# Allegro board P1_2024_433C_STERGAREL_ELISABETA-ELENA_SERS_N21_OrCAD.brd
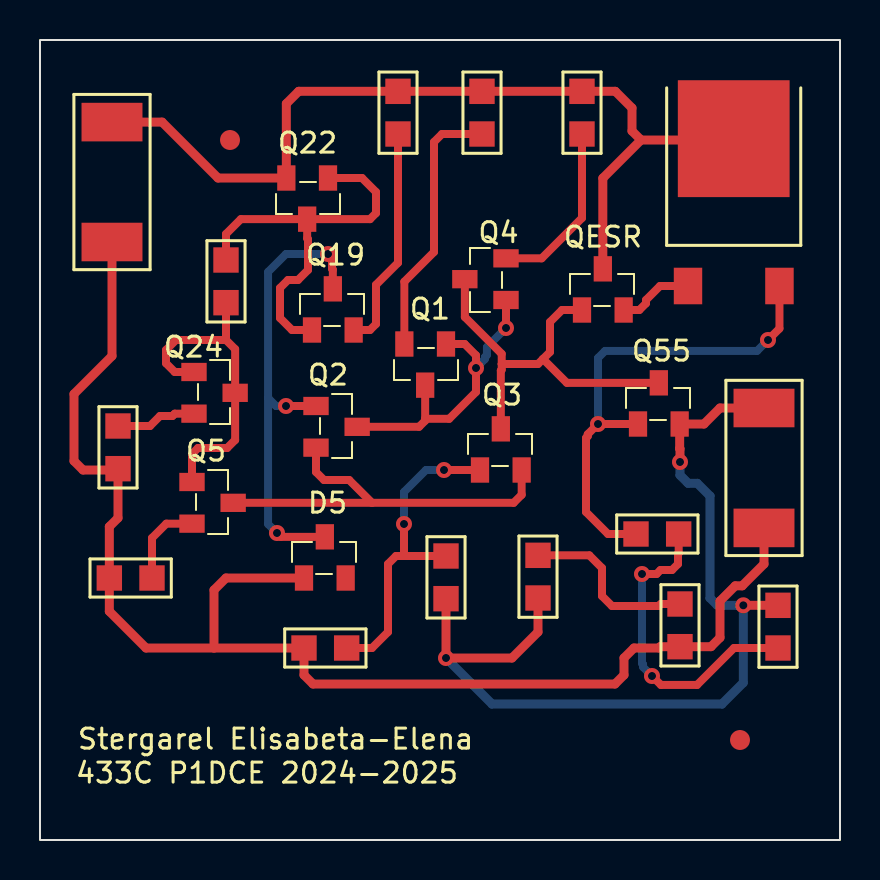
[diagram p0: board, top side]
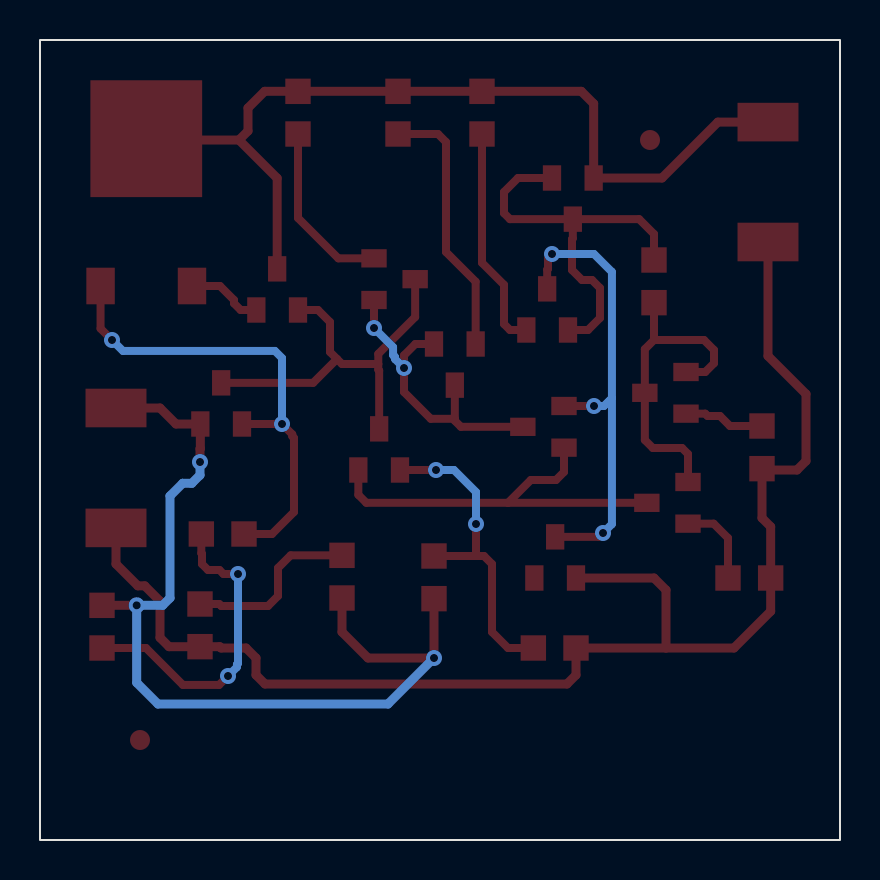
[diagram p1: board, bottom side, seen from below]

Outline 40 x 40 mm; copper layers: TOP, BOTTOM. Coordinates in mm from the lower left corner of the outline.
Outline path: rectangle 0,0 40,40

## Design rules (mm)
nets with their own width: min track width 0.4; nets N208506 N208522 N208646 N208652 N208728 N208762 N208912 N209608 N209614 N209650 N209658 N209706 N210042 N210082 N216038 N2084760
nets with their own width: min track width 0.45; nets 0 OUT VCC

## Placement (name value [footprint] x y rotation side)
D5  BZX84-C5V1  [TO236AA]  13.2 13.1 270 top
J1  CON2  [SMR2512]  3.6 29.9 90 top
J2  CON2  [SMR2512]  36.2 21.6 270 top
NOREF  -  [unnamed]  35 5 0 top
NOREF#2  -  [unnamed]  9.5 35 0 top
Q1  QBC807-25  [TO236AA]  20.3 24.8 90 top
Q2  QBC817-25  [TO236AA]  13.8 21.7 180 top
Q3  QBC817-25  [TO236AA]  22 18.5 270 top
Q4  QBC807-25  [TO236AA]  23.3 27 0 top
Q5  QBC817-25  [TO236AA]  7.6 17.9 180 top
Q19  QBC807-25  [TO236AA]  13.6 25.5 270 top
Q22  QBC807-25  [TO236AA]  14.4 33.1 90 top
Q24  QBC817-25  [TO236AA]  7.7 23.4 180 top
Q55  QBC817-25  [TO236AA]  29.9 20.8 270 top
QESR  QBC846B  [TO236AA]  27.1 26.5 270 top
QESR2  QMJD31C  [SMDPAK]  32.4 27.7 0 top
R2  220  [SMR0805]  17.9 35.3 90 top
R8  220  [SMR0805]  5.6 13.1 180 top
R10  100  [SMR0805]  22.1 35.3 90 top
R11  100  [SMR0805]  27.1 35.3 90 top
R29  3.3k  [SMR0805]  9.3 29 270 top
R30  220  [SMR0805]  3.9 20.7 270 top
R40  15k  [SMR0805]  13.2 9.6 0 top
R41  15k  [SMR0805]  20.3 14.2 270 top
RC2  0.47  [SMR0805]  36.9 9.6 90 top
RC4  1  [SMR0805]  29.8 15.3 0 top
RLOAD  51  [SMR0805]  24.9 12.1 90 top
RLOAD1  1k  [SMR0805]  32 11.8 270 top

## Library data of the parts
D5 = BZX84-C5V1_0
J1 J2 = CON2
Q1 = QBC807-25_3
Q2 = QBC817-25_2
Q3 = QBC817-25_4
Q4 = QBC807-25_4
Q5 = QBC817-25_3
Q19 = QBC807-25_1
Q22 = QBC807-25_0
Q24 = QBC817-25_0
Q55 = QBC817-25_5
QESR = QBC846B_0
QESR2 = QMJD31C_0
R2 R8 R10 R11 R29 R30 R40 R41 RC2 RC4 RLOAD RLOAD1 = R

## Footprints (pads in the part's own frame, mm; a bottom-side part is the same pattern mirrored in y, then rotated)
SMDPAK
  rect 1.422x1.829 smd: 1(0,0) 3(4.572,0)
  rect 5.588x5.842 smd: 4(2.286,7.366)
SMR0805
  rect 1.27x1.27 smd: 1(0,0) 2(2.134,0)
SMR2512
  rect 1.93x3.048 smd: 1(0,0) 2(5.994,0)
TO236AA
  rect 1.27x0.914 smd: 1(0,0) 2(0,2.083) 3(-2.057,1.041)
unnamed
  round 1 smd: (0,0)

## Nets
VCC: J1.2 Q22.2(E) QESR.3 QESR2.4 R2.2 R10.2 R11.2
0: D5.1 J1.1 J2.2 R8.2 R30.2 R40.1 RLOAD1.2
OUT: J2.1 Q55.2(E) R41.2 RC2.2 RLOAD.1
N208506: Q3.3 Q4.3 Q55.3 QESR.1
N208522: D5.3(C) Q2.1 Q19.3
N208646: Q19.1 Q22.1 Q22.3 R29.1
N208652: Q19.2(E) R2.1
N208728: Q55.1 QESR2.3(E) RC4.1
N208762: QESR.2(E) QESR2.1
N208912: RLOAD.2 RLOAD1.1
N209608: Q1.2(E) R10.1
N209614: Q4.2(E) R11.1
N209650: Q1.1 Q1.3 Q2.3 Q4.1
N209658: Q2.2(E) Q3.2(E) Q5.3
N209706: Q5.2(E) R8.1
N210042: Q5.1 Q24.1 Q24.3 R29.2
N210082: Q24.2(E) R30.1
N216038: Q3.1 R40.2 R41.1
N2084760: RC2.1 RC4.2

Pads without a net: D5 2

## Via types
v1: diameter 0.8, hole 0.4, TOP to BOTTOM, 14 vias

## Routing (per net, layer and track width the routed paths; a pad name or vN(x,y) marks a point on that pad's centre or on a via; arc(x,y) is an arc through that point)
VCC: length 45.2
  TOP w0.45: J1.2 6.11,35.89 8.9,33.1 Q22.2 12.32,36.82 12.93,37.43 R2.2 R10.2 R11.2 28.77,37.43 29.6,36.6 29.6,35.45 30.05,35 ; QESR.3 28.14,33.09 30.05,35 ; QESR2.4 34.62,35 30.05,35
0: length 70
  TOP w0.45: J2.2 36.2,13.8 35.11,12.71 34.76,12.71 34,11.95 34,10.12 33.55,9.67 RLOAD1.2 31.01,9.67 30.95,9.6 29.7,9.6 29.2,9.1 29.2,8.25 28.75,7.8 13.65,7.8 13.2,8.25 R40.1 8.7,9.6 ; D5.1 9.3,13.1 8.7,12.5 8.7,9.6 ; J1.1 3.6,24.2 1.7,22.3 1.7,18.95 2.15,18.5 3.83,18.5 R30.2 3.9,16.1 3.47,15.67 R8.2 3.47,11.43 5.3,9.6 8.7,9.6
OUT: length 47.6
  TOP w0.45: RLOAD.1 24.9,10.4 23.6,9.1 v1(20.3,9.1) R41.2 ; J2.1 34,21.6 33.2,20.8 Q55.2 31.98,19.57 32,19.56 v1(32,18.9) ; RC2.2 v1(35.17,11.73)
  BOTTOM w0.45: v1(32,18.9) 32,18.24 32.41,17.84 32.86,17.84 33.5,17.2 33.5,12.1 33.87,11.73 v1(35.17,11.73) 35.17,7.87 34.1,6.8 22.6,6.8 v1(20.3,9.1)
N208506: length 20.6
  TOP w0.4: 23.09,23.8 23.09,23.51 23.04,23.47 Q3.3 ; 23.09,23.8 24.9,23.8 25.15,24.05 ; 23.09,23.8 23.09,24.31 21.24,26.15 Q4.3 ; 25.15,24.05 25.5,24.4 25.5,25.9 26.1,26.5 QESR.1 ; 25.15,24.05 26.34,22.86 Q55.3
N208522: length 23.5
  TOP w0.4: D5.3 12.04,15.16 v1(11.85,15.35) ; Q19.3 14.64,28.52 14.6,28.56 14.6,29.1 v1(14.4,29.3) ; Q2.1 v1(12.3,21.7)
  BOTTOM w0.4: 11.4,22.1 11.4,28.4 12.3,29.3 v1(14.4,29.3) ; 11.4,22.1 11.4,15.8 v1(11.85,15.35) ; 11.4,22.1 11.8,21.7 v1(12.3,21.7)
N208646: length 20.7
  TOP w0.4: Q22.1 16.1,33.1 16.8,32.4 16.8,31.34 16.5,31.04 Q22.3 ; R29.1 9.3,30.3 10.04,31.04 Q22.3 ; Q22.3 13.36,30.08 13.4,30.04 13.4,28.5 12.9,28 12.4,28 12,27.6 12,26.1 12.6,25.5 Q19.1
N208652: length 11.2
  TOP w0.4: R2.1 17.9,28.86 16.8,27.76 16.8,25.8 16.5,25.5 Q19.2
N208728: length 24.7
  TOP w0.4: v1(36.4,25) 36.97,25.57 QESR2.3 ; RC4.1 28.4,15.3 27.3,16.4 27.3,20.1 27.39,20.19 27.39,20.29 v1(27.9,20.8) Q55.1
  BOTTOM w0.4: v1(27.9,20.8) 27.9,24.1 28.25,24.45 35.85,24.45 v1(36.4,25)
N208762: length 3.8
  TOP w0.4: QESR.2 29.97,26.5 30.3,26.83 30.3,27 31,27.7 QESR2.1
N208912: length 9
  TOP w0.4: RLOAD.2 27.47,14.23 28.1,13.6 28.1,12.2 28.6,11.7 30.94,11.7 31.04,11.8 RLOAD1.1
N209608: length 13.3
  TOP w0.4: Q1.2 18.22,27.92 19.7,29.4 19.7,34.9 20.1,35.3 R10.1
N209614: length 8.8
  TOP w0.4: Q4.2 25.08,29.08 27.1,31.1 R11.1
N209650: length 16
  TOP w0.4: 19.26,21.06 Q1.3 ; 19.26,21.06 19.26,20.96 18.95,20.66 Q2.3 ; 19.26,21.06 20.46,21.06 21.8,22.4 v1(21.8,23.6) 21.8,24.23 21.23,24.8 Q1.1 ; Q4.1 v1(23.3,25.6)
  BOTTOM w0.4: v1(21.8,23.6) 22.25,24.05 22.25,24.15 22.35,24.25 22.35,24.65 v1(23.3,25.6)
N209658: length 20.5
  TOP w0.4: 16.6,16.86 23.68,16.86 24.08,17.26 Q3.2 ; 16.6,16.86 Q5.3 ; 16.6,16.86 15.46,18 14.2,18 13.8,18.4 Q2.2
N209706: length 4.3
  TOP w0.4: Q5.2 6.32,15.82 5.6,15.1 R8.1
N210042: length 16.4
  TOP w0.4: Q5.1 7.6,19.3 7.9,19.6 9.36,19.6 9.76,20 Q24.3 9.76,24.54 9.3,25 ; 9.3,25 6.8,25 6.3,24.5 6.3,23.84 6.74,23.4 Q24.1 ; 9.3,25 R29.2
N210082: length 4.1
  TOP w0.4: Q24.2 6.74,21.32 6.62,21.2 6,21.2 5.5,20.7 R30.1
N216038: length 16.3
  TOP w0.4: 18.2,14.2 17.8,14.2 17.4,13.8 17.4,10.4 16.6,9.6 R40.2 ; 18.2,14.2 v1(18.2,15.8) ; 18.2,14.2 R41.1 ; Q3.1 v1(20.2,18.5)
  BOTTOM w0.4: v1(20.2,18.5) 19.3,18.5 18.2,17.4 v1(18.2,15.8)
N2084760: length 16.1
  TOP w0.4: v1(30.6,8.2) 31.05,7.75 32.85,7.75 34.7,9.6 RC2.1 ; RC4.2 31.93,14.34 31.9,14.3 31.9,13.8 31.6,13.5 31.03,13.5 30.83,13.3 v1(30.1,13.3)
  BOTTOM w0.4: v1(30.6,8.2) 30.15,8.65 30.15,8.78 30.1,8.83 v1(30.1,13.3)

## Text on the board
Ref Des/Silkscreen Top: 433C P1DCE 2024-2025 | Stergarel Elisabeta-Elena
XSECTION_CHART: *  SURFACE | L1 TOP CONDUCTOR | *  DIELECTRIC | L2 BOTTOM CONDUCTOR | DESIGN CROSS SECTION CHART | ___________________________ | TOTAL THICKNESS 0.26416 MM | 1-2
NCLEGEND-1-2: FIGURE | FINISHED_SIZE | 0.4 | DRILL CHART: TOP to BOTTOM | ALL UNITS ARE IN MILLIMETERS | PLATED | QTY | 14
